# Altium PCB NAPaC_DetachableModule.PcbDoc
Units mm, origin at the board's own origin, x right, y up, seen from the top; angles counter-clockwise.
Board outline 55.61 x 42.41 mm, 2 copper layers (Top Layer, Bottom Layer); 22 components, 15 nets, 64 pads, 2 vias.
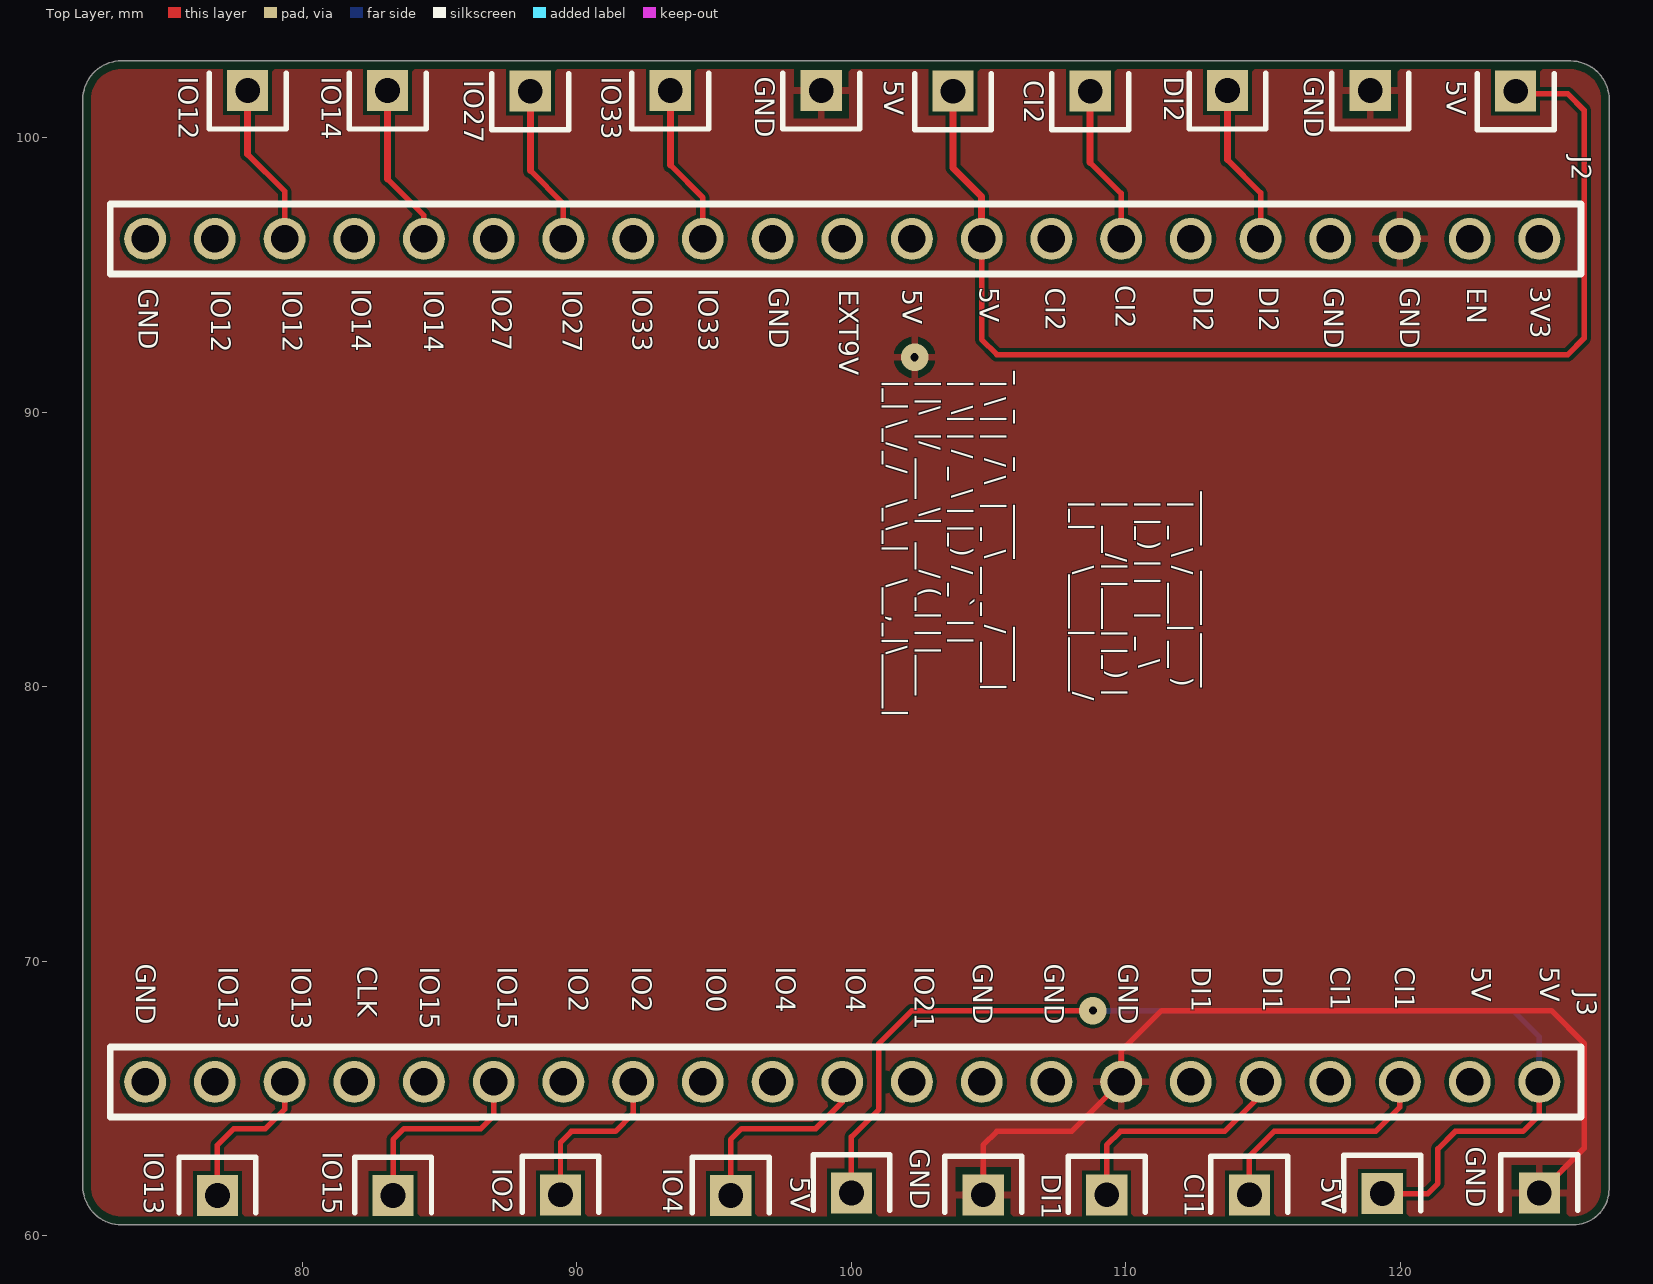
[diagram p0: Top Layer view]
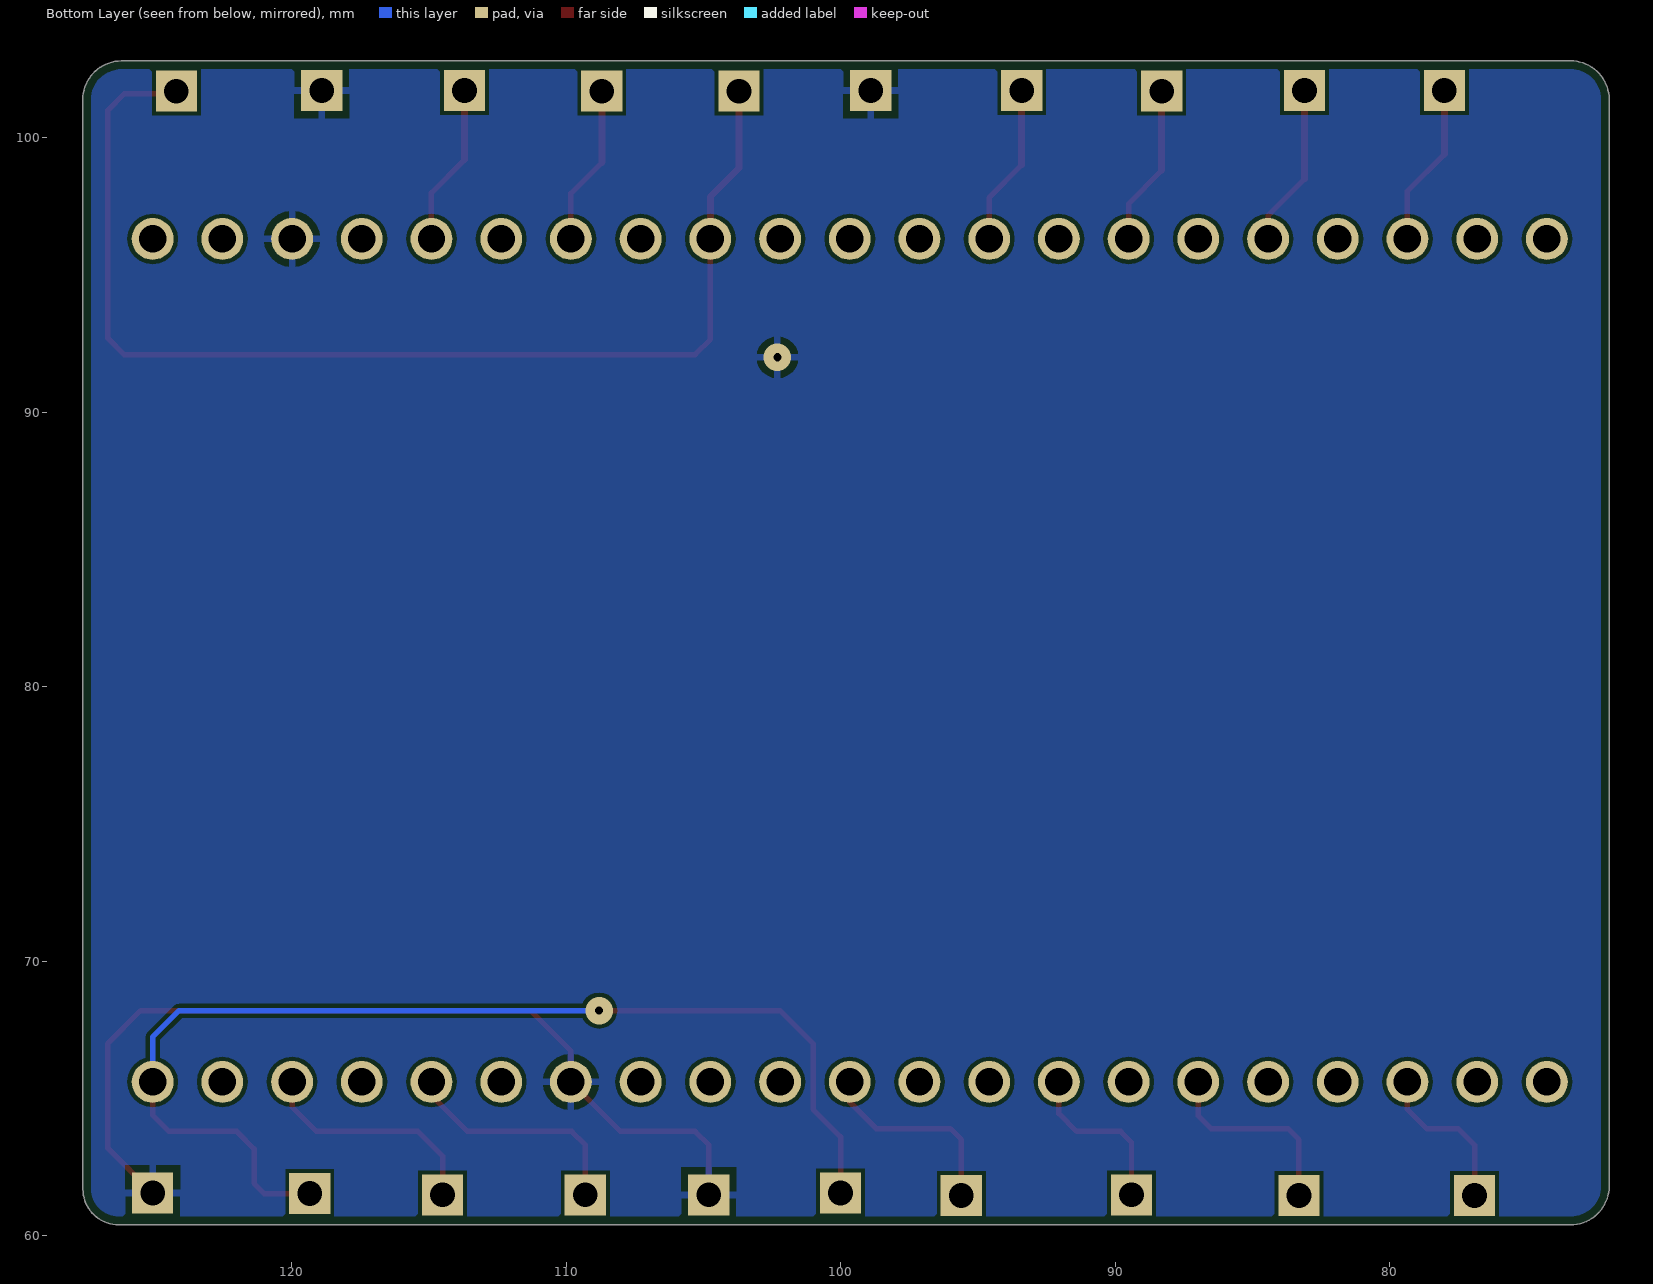
[diagram p1: Bottom Layer view, seen from below]

## Layer stack, top to bottom
Top Solder: solder mask 0.0102, Solder Resist, Dk 3.5
Top Layer: signal copper 0.0356
Dielectric 1: dielectric 0.32, FR-4, Dk 4.8
Bottom Layer: signal copper 0.0356
Bottom Solder: solder mask 0.0102, Solder Resist, Dk 3.5

## Board outline
72,61.8 72,101.4 71.997,101.4 cw(c73.4,101.4) 73.4,102.803 73.4,102.8 126.204,102.8 126.204,102.799 cw(c126.204,101.396) 127.608,101.396 127.603,101.396 127.603,61.699 127.605,61.699 cw(c126.301,61.699) 126.301,60.395 126.301,60.4 73.4,60.4 73.4,60.397 cw(c73.4,61.8)

## Design rules (kind name [scope] priority, off if disabled: settings)
BoardOutlineClearance [All] p1: gap=0.3 ignorepadtopadclearanceinfootprint=FALSE
Clearance Clearance_1 [All] p1: gap=0.15 ignorepadtopadclearanceinfootprint=TRUE
HoleSize [All] p1: absolutevalues=TRUE maxlimit=2.54 minlimit=0.3 maxpercent=80.000 minpercent=20.000
HoleToHoleClearance [All] p1: gap=0.5 allowstackedmicrovias=TRUE
MinimumSolderMaskSliver [All] p1: minsoldermaskwidth=0.1
PlaneConnect [All] p1: planeconnectstyle=Relief reliefexpansion=0.3 reliefentries=4 reliefconductorwidth=0.2 reliefairgap=0.2
PolygonConnect [All] p1: connectstyle=Relief reliefconductorwidth=0.254 reliefentries=4 polygonreliefangle="90 Angle" airgapwidth=0.254
RoutingVias [All] p1: holewidth=0.5 width=1.2 viastyle="Through Hole" minholewidth=0.3 minwidth=1 maxholewidth=1.5 maxwidth=2.5
SilkToSilkClearance [All] p1: silktosilkclearance=0.15
SilkToSolderMaskClearance [IsPad] p1: minsilkscreentomaskgap=0.15 clearancetoexposedcopper=TRUE
SolderMaskExpansion [All] p1: expansion=0.05
UnRoutedNet [All] p1: checkbadconnections=TRUE
Width [All] p1: maxlimit=2 minlimit=0.15 preferedwidth=0.2
23 further rules are at their usual default settings.

## Classes and differential pairs
component class NAPaC_DetachableModule: 5Va 5Vb CI1 CI2 DI1 DI2 GNDa GNDb IO2 IO4 io12 IO13 IO14 IO15 IO27 IO33 J2 J3

## Components (designator, comment, footprint, x,y, rotation, side; value= is the part's Value field where it differs from the comment)
5V "Plug" PIN_1 100,61.555 r0 top (schematic designator 5Vb)
5V "Plug" PIN_1 124.2,101.7 r180 top (schematic designator 5Va)
5V "Plug" PIN_1 103.7,101.7 r180 top (schematic designator 5Va)
5V "Plug" PIN_1 119.34,61.535 r0 top (schematic designator 5Vb)
CI1 "Plug" PIN_1 114.5,61.485 r0 top (schematic designator P10)
CI2 "Plug" PIN_1 108.7,101.7 r180 top (schematic designator P3)
DI1 "Plug" PIN_1 109.3,61.485 r0 top (schematic designator P11)
DI2 "Plug" PIN_1 113.7,101.72 r180 top (schematic designator P2)
GND "Plug" PIN_1 125.065,61.555 r0 top (schematic designator GNDb)
GND "Plug" PIN_1 98.9,101.72 r180 top (schematic designator GNDa)
GND "Plug" PIN_1 118.9,101.72 r180 top (schematic designator GNDa)
GND "Plug" PIN_1 104.8,61.485 r0 top (schematic designator GNDb)
IO2 "Plug" PIN_1 89.4,61.485 r0 top (schematic designator P14)
IO4 "Plug" PIN_1 95.6,61.46 r0 top (schematic designator P13)
IO12 "Plug" PIN_1 78,101.72 r180 top (schematic designator P8)
IO13 "Plug" PIN_1 76.9,61.46 r0 top (schematic designator P16)
IO14 "Plug" PIN_1 83.1,101.72 r180 top (schematic designator P7)
IO15 "Plug" PIN_1 83.3,61.46 r0 top (schematic designator P15)
IO27 "Plug" PIN_1 88.3,101.7 r180 top (schematic designator P6)
IO33 "Plug" PIN_1 93.4,101.72 r180 top (schematic designator P5)
J2 "CON_21P" PINS_HEADER-21 125.065,96.315 r180 top
J3 "CON_21P" PINS_HEADER-21 125.065,65.6 r180 top

## Footprints (in the part's own frame and the unit in brackets; to place one, negate y for a bottom-side part, rotate by r counter-clockwise, add the part's x,y. Pads: shape width x height; smd on the part's side, far side on the other; paste and mask are expansions set on the pad)
PIN_1 [mm]
  rect 1.5x1.5 hole 0.9: 1(0,0)
  silkscreen extent -1.4,-0.64 1.4,1.4
PINS_HEADER-21 [mil]
  round 60 hole 39.37: 1(0,0) 2(100,0) 3(200,0) 4(300,0) 5(400,0) 6(500,0) 7(600,0) 8(700,0) 9(800,0) 10(900,0) 11(1000,0) 12(1100,0) 13(1200,0) 14(1300,0) 15(1400,0) 16(1500,0) 17(1600,0) 18(1700,0) 19(1800,0) 20(1900,0) 21(2000,0)
  round 20 on Top Overlay: ""(0,-90)
  silkscreen extent -60,-50 2050,50

## Part data
J2 J3: library part PINS_HEADER, "21 Positions Header, Breakaway Connector 0.100\" (2.54mm) Through Hole Tin", Supplier Part Number 1=S1012EC-21-ND, Supplier 1=Digi-Key
5V 5V 5V 5V CI1 CI2 DI1 DI2 GND GND GND GND IO2 IO4 IO12 IO13 IO14 IO15 IO27 IO33: LatestRevisionDate=17-Jul-2002, LatestRevisionNote="Re-released for DXP Platform.", Publisher="Altium Limited"

## Via types
v1: diameter 1, hole 0.3, Top Layer to Bottom Layer, 2 vias

## Nets (pads, with @x,y where several pads share a name; then routed paths per layer and width w, separated by ;. In a path a pad name is that pad's centre, name@x,y a point inside that pad or via, vN(x,y) a via of type N, cw(c..) or ccw(c..) an arc to the next point about the centre after c; other vN are vias at no path point)
5Va: 5V.1@103.7,101.7 5V.1@124.2,101.7 J2.9 | length 43.3
  Top Layer w0.2: J2.9 104.745,92.655 105.3,92.1 126.1,92.1 126.7,92.7 126.7,101 126.1,101.6 124.3,101.6 5V.1@124.2,101.7
  Top Layer w0.254: 5V.1@103.7,102 103.7,101.7 103.7,98.9 104.745,97.855 J2.9
5Vb: 5V.1@100,61.555 5V.1@119.34,61.535 J3.1 | length 41.3
  Top Layer w0.2: 5V.1@100,61.555 100,63.6 101,64.6 101,67 102.2,68.2 v1(108.8,68.2) ; 5V.1@119.34,61.535 121,61.535 121.365,61.9 121.365,63.165 122,63.8 124.465,63.8 125.065,64.4 J3.1
  Bottom Layer w0.2: v1(108.8,68.2) 124.1,68.2 125.065,67.235 J3.1
CI1: CI1.1 J3.3 | length 8.6
  Top Layer w0.2: CI1.1 114.5,62.9 115.4,63.8 119.1,63.8 119.985,64.685 J3.3
CI2: CI2.1 J2.7 | length 6.2
  Top Layer w0.2: 108.7,99.1 109.825,97.975 J2.7
  Top Layer w0.254: 108.7,99.1 CI2.1 CI2.1@108.7,102
DI1: DI1.1 J3.5 | length 8.9
  Top Layer w0.2: DI1.1 109.3,63.3 109.8,63.8 113.6,63.8 114.905,65.105 J3.5
  Top Layer w0.254: J3.5@114.635,65.6 J3.5
DI2: DI2.1 J2.5 | length 6.1
  Top Layer w0.2: 113.7,99.2 114.905,97.995 J2.5
  Top Layer w0.254: 113.7,99.2 DI2.1 DI2.1@113.7,101.9
GND: GND.1 J2.3 J3.7 | length 33
  Top Layer w0.2: GND.1@104.8,61.485 104.8,63.3 105.3,63.8 108.025,63.8 J3.7 109.825,66.725 111.3,68.2 125.5,68.2 126.7,67 126.7,63.19 GND.1@125.065,61.555
  other v1: 102.3,92
IO2: IO2.1 J3.14 | length 6.1
  Top Layer w0.2: IO2.1 89.4,63.4 89.8,63.8 91.4,63.8 92.045,64.445 J3.14
IO4: IO4.1 J3.11 | length 7.4
  Top Layer w0.2: IO4.1 95.6,63.5 96,63.9 98.7,63.9 99.665,64.865 J3.11
IO12: IO12.1 J2.19 | length 6.1
  Top Layer w0.2: 78,99.4 79.345,98.055 J2.19
  Top Layer w0.254: 78,99.4 IO12.1 IO12.1@78,101.9
IO13: IO13.1 J3.19 | length 6
  Top Layer w0.2: IO13.1 76.9,63.3 77.5,63.9 78.645,63.9 79.345,64.6 J3.19
  Top Layer w0.254: J3.19@79.195,65.6 J3.19
IO14: IO14.1 J2.17 | length 6.1
  Top Layer w0.2: 83.1,98.5 84.425,97.175 J2.17
  Top Layer w0.254: 83.1,98.5 IO14.1 IO14.1@83.1,101.9
IO15: IO15.1 J3.16 | length 7.3
  Top Layer w0.2: IO15.1 83.3,63.5 83.7,63.9 86.5,63.9 86.965,64.365 J3.16
IO27: IO27.1 J2.15 | length 6.2
  Top Layer w0.2: 88.3,98.8 89.505,97.595 J2.15
  Top Layer w0.254: 88.3,98.8 IO27.1 IO27.1@88.3,102
IO33: IO33.1 J2.13 | length 6.1
  Top Layer w0.2: 93.4,99 94.585,97.815 J2.13
  Top Layer w0.254: 93.4,99 IO33.1 IO33.1@93.4,101.9
pads on no net: J2. J2.1 J2.2 J2.4 J2.6 J2.8 J2.10 J2.11 J2.12 J2.14 J2.16 J2.18 J2.20 J2.21 J3. J3.2 J3.4 J3.6 J3.8 J3.9 J3.10 J3.12 J3.13 J3.15 J3.17 J3.18 J3.20 J3.21
copper on no net: | length 0.1
  Top Layer w0.254: 107.2,65.515 107.285,65.6

## Polygon pours and split planes (outlines as drawn)
GND on Top Layer "Top Layer-Gnd" (solid, pour order 4): 72,61.8 72,101.4 71.997,101.4 cw(c73.4,101.4) 73.4,102.803 73.4,102.8 126.204,102.8 126.204,102.799 cw(c126.204,101.396) 127.608,101.396 127.603,101.396 127.603,61.699 127.605,61.699 cw(c126.301,61.699) 126.301,60.395 126.301,60.4 73.4,60.4 73.4,60.397 cw(c73.402,61.798)
GND on Bottom Layer "Top Layer-Gnd" (solid, remove dead copper, pour order 5): 72,61.8 72,101.4 71.997,101.4 cw(c73.4,101.4) 73.4,102.803 73.4,102.8 126.204,102.8 126.204,102.799 cw(c126.204,101.396) 127.608,101.396 127.603,101.396 127.603,61.699 127.605,61.699 cw(c126.301,61.699) 126.301,60.395 126.301,60.4 73.4,60.4 73.4,60.397 cw(c73.402,61.798)

## Silkscreen, mask and mechanical layers (free items; w line width, h text height)
Top Overlay:
  text "CI2" at 109.4,94.62 h1.2 r270
  text "DI2" at 112.228,94.58 h1.2 r270
  text "DI2" at 114.628,94.58 h1.2 r270
  text "3V3" at 124.52,94.58 h1.2 r270
  text "5V" at 104.44,94.56 h1.2 r270
  text "GND" at 96.76,94.54 h1.2 r270
  text "CI2" at 106.84,94.54 h1.2 r270
  text "GND" at 116.998,94.536 h1.2 r270
  text "GND" at 119.76,94.54 h1.2 r270
  text "EN" at 122.2,94.54 h1.2 r270
  text "IO27" at 86.68,94.52 h1.2 r270
  text "GND" at 73.8,94.5 h1.2 r270
  text "IO14" at 81.56,94.5 h1.2 r270
  text "IO33" at 91.8,94.5 h1.2 r270
  text "IO33" at 94.2,94.5 h1.2 r270
  text "5V" at 101.64,94.48 h1.2 r270
  text "IO12" at 76.44,94.46 h1.2 r270
  text "IO12" at 79.04,94.46 h1.2 r270
  text "IO14" at 84.2,94.46 h1.2 r270
  text "IO27" at 89.24,94.46 h1.2 r270
  text "EXT9V" at 99.32,94.46 h1.2 r270
  text "_   _    _    ____        ____  /  | \ | |  / \  |  _ \ __ _ / ___| /  |  \| | / _ \ | |_) / _` | |     /  | |\  |/ ___ \|  __/ (_| | |___  /  |_| \_/_/   \_\_|   \__,_|\____|" at 101.1,91.5 h1.2 r270
  text "____   ____ ____   /  |  _ \ / ___| __ )  /  | |_) | |   |  _ \  /  |  __/| |___| |_) | /  |_|    \____|____/" at 107.9,87.1 h1.2 r270
  text "GND" at 73.7,69.9 h1.2 r270
  text "GND" at 104.2,69.9 h1.2 r270
  text "GND" at 106.8,69.9 h1.2 r270
  text "GND" at 109.5,69.9 h1.2 r270
  text "CLK" at 81.77,69.813 h1.2 r270
  text "IO13" at 76.707,69.794 h1.2 r270
  text "IO13" at 79.37,69.794 h1.2 r270
  text "IO15" at 84.044,69.793 h1.2 r270
  text "IO15" at 86.87,69.793 h1.2 r270
  text "IO2" at 89.47,69.793 h1.2 r270
  text "IO2" at 91.77,69.793 h1.2 r270
  text "IO0" at 94.487,69.794 h1.2 r270
  text "IO4" at 97.027,69.794 h1.2 r270
  text "IO4" at 99.567,69.794 h1.2 r270
  text "IO21" at 102.07,69.793 h1.2 r270
  text "DI1" at 112.17,69.793 h1.2 r270
  text "DI1" at 114.77,69.794 h1.2 r270
  text "CI1" at 117.222,69.793 h1.2 r270
  text "CI1" at 119.57,69.793 h1.2 r270
  text "5V" at 122.37,69.794 h1.2 r270
  text "5V" at 124.852,69.794 h1.2 r270
Mechanical 6:
  lines w0.1: 71.997,61.8 ccw(c73.4,61.8) 73.4,60.397 ; 71.997,101.4 cw(c73.4,101.4) 73.4,102.803 ; 72,61.8 72,101.4 ; 73.4,60.4 126.301,60.4 ; 73.4,102.8 126.204,102.8 ; 126.204,102.799 cw(c126.204,101.396) 127.608,101.396 ; 126.301,60.395 ccw(c126.301,61.699) 127.605,61.699 ; 127.603,61.699 127.603,101.396

## Dimensions
126.204,102.8 to 126.301,60.4 on Mechanical 8
127.603,61.699 to 71.997,61.8 on Mechanical 8
125.065,96.315 to 125.065,65.6 on Mechanical 8